# Altium PCB W-N-DM-V31_Display.PcbDoc
Units mm, origin at the board's own origin, x right, y up, seen from the top; angles counter-clockwise.
Board outline 40 x 160 mm, 2 copper layers (Top Layer, Bottom Layer); 73 components, 43 nets, 179 pads, 77 vias.
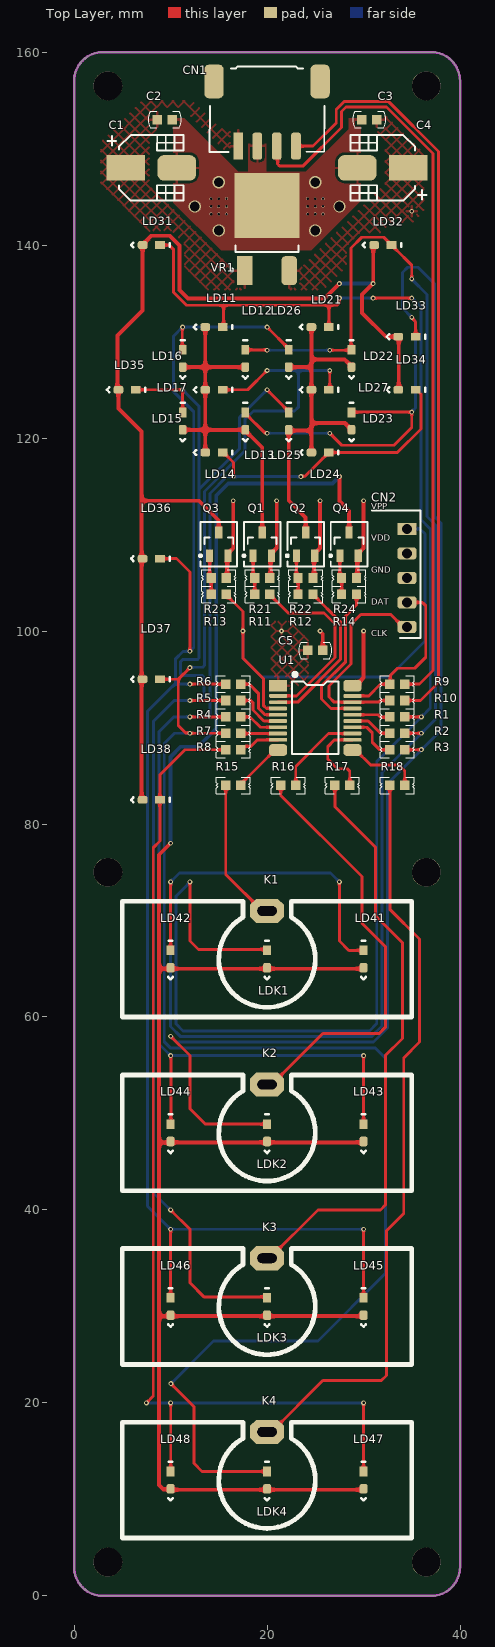
[diagram p0: Top Layer view]
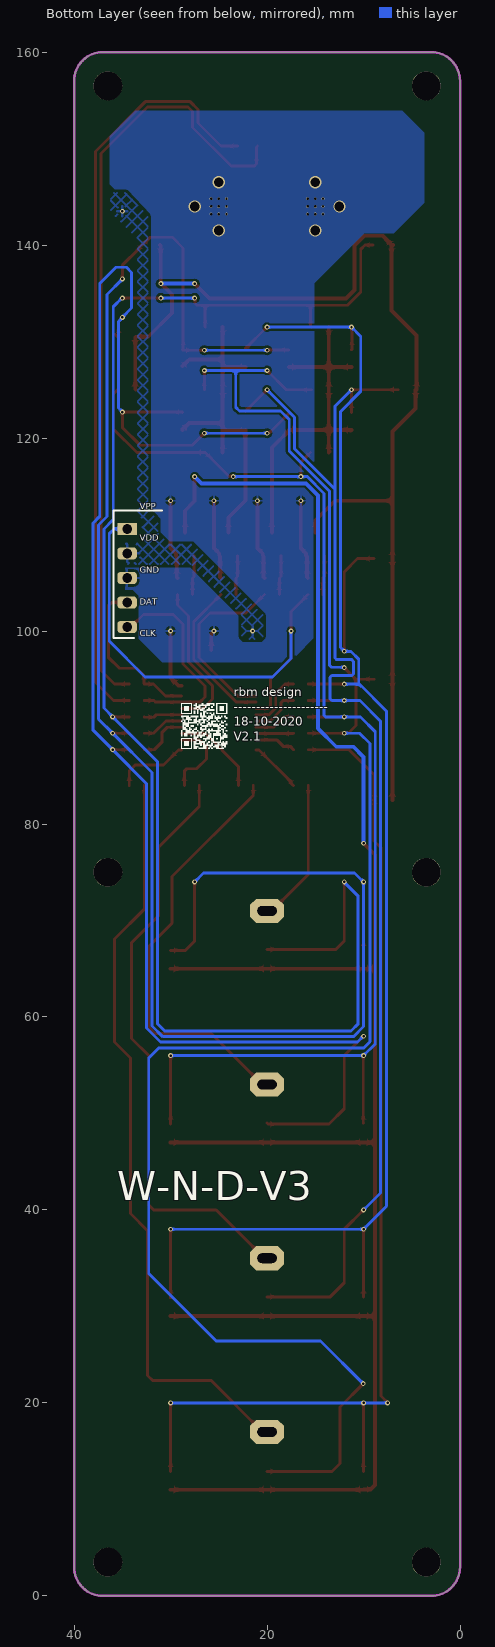
[diagram p1: Bottom Layer view, seen from below]
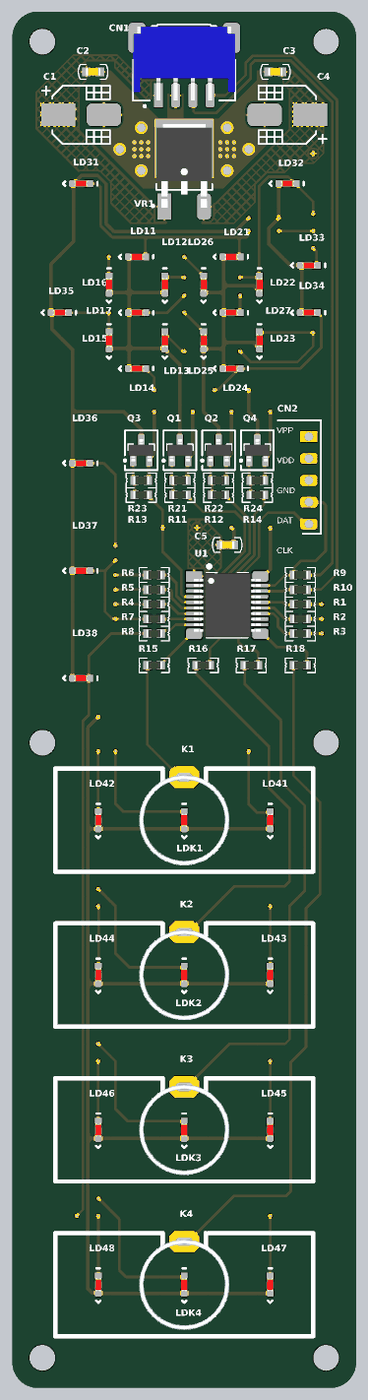
[diagram p2: 3D render of the assembled board from above, using the file's embedded part models]

## Layer stack, top to bottom
Top Solder: solder mask 0.0102, Solder Resist, Dk 3.5
Top Layer: signal copper 0.0356
Dielectric 1: dielectric 0.32, FR-4, Dk 4.8
Bottom Layer: signal copper 0.0356
Bottom Solder: solder mask 0.0102, Solder Resist, Dk 3.5

## Board outline
0,3 0,157 cw(c3,157) 3,160 37,160 cw(c37,157) 40,157 40,3 cw(c37,3) 37,0 3,0 cw(c3,3)

## Design rules (kind name [scope] priority, off if disabled: settings)
Clearance [All] p1: gap=0.254 ignorepadtopadclearanceinfootprint=FALSE except(0: Arc-Hole Track-Hole SMDPad-Hole THPad-Hole Via-Hole Fill-Hole Poly-Hole Region-Hole Text-Hole)
HoleSize [All] p1: absolutevalues=TRUE maxlimit=3.5 minlimit=0.025 maxpercent=80.000 minpercent=20.000
PlaneConnect [All] p1: planeconnectstyle=Relief reliefexpansion=0.508 reliefentries=4 reliefconductorwidth=0.3 reliefairgap=0.254
PolygonConnect [All] p1: connectstyle=Relief reliefconductorwidth=0.254 reliefentries=4 polygonreliefangle="90 Angle" airgapwidth=0.254
RoutingVias [All] p1: holewidth=0.254 width=0.508 viastyle="Through Hole" minholewidth=0.254 minwidth=0.3 maxholewidth=1 maxwidth=1.27
SolderMaskExpansion [All] p1: expansion=0.102 istentingtop=FALSE
UnRoutedNet [All] p1: checkbadconnections=TRUE
Width [All] p1: maxlimit=1 minlimit=0.254 preferedwidth=0.3
27 further rules are at their usual default settings.

## Components (designator, comment, footprint, x,y, rotation, side; value= is the part's Value field where it differs from the comment)
C1 "100uF ±20% 25V" C_SMD_Ø6.3*5.4MM 8,148 r0 top locked
C2 "470nF ±10% 25V X7R" C_0603 9.4,153 r0 top locked
C3 "100nF ±10% 25V X7R" C_0603 30.6,153 r180 top locked
C4 "100uF ±20% 16V" C_SMD_Ø6.3*5.4MM 32,148 r180 top locked
C5 "470nF ±10% 25V X7R" C_0603 25,98 r0 top
CN1 "PH Header Male; White" CN_4P_A2001WR-S-XP-LCP 20,153 r90 top locked
CN2 "Pin Header" CN_PIC_MCU_DEBUGGER_RIGHTANGLE 34.5,105.5 r0 top
K1 "Holo Type" K_CAP-TOUCH_WITH_LED-OPTION 20,66 r0 top locked
K2 "Holo Type" K_CAP-TOUCH_WITH_LED-OPTION 20,48 r0 top locked
K3 "Holo Type" K_CAP-TOUCH_WITH_LED-OPTION 20,30 r0 top locked
K4 "Holo Type" K_CAP-TOUCH_WITH_LED-OPTION 20,12 r0 top locked
LD11 "3V 20mA >700mcd 130°" LED_SMD0603 14.5,131.5 r180 top locked
LD12 "3V 20mA >700mcd 130°" LED_SMD0603 17.75,128.25 r270 top locked
LD13 "3V 20mA >700mcd 130°" LED_SMD0603 17.75,121.75 r270 top locked
LD14 "3V 20mA >700mcd 130°" LED_SMD0603 14.5,118.5 r180 top locked
LD15 "3V 20mA >700mcd 130°" LED_SMD0603 11.25,121.75 r270 top locked
LD16 "3V 20mA >700mcd 130°" LED_SMD0603 11.25,128.25 r270 top locked
LD17 "3V 20mA >700mcd 130°" LED_SMD0603 14.5,125 r180 top locked
LD21 "3V 20mA >700mcd 130°" LED_SMD0603 25.5,131.5 r180 top locked
LD22 "3V 20mA >700mcd 130°" LED_SMD0603 28.75,128.25 r270 top locked
LD23 "3V 20mA >700mcd 130°" LED_SMD0603 28.75,121.75 r270 top locked
LD24 "3V 20mA >700mcd 130°" LED_SMD0603 25.5,118.5 r180 top locked
LD25 "3V 20mA >700mcd 130°" LED_SMD0603 22.25,121.75 r270 top locked
LD26 "3V 20mA >700mcd 130°" LED_SMD0603 22.25,128.25 r270 top locked
LD27 "3V 20mA >700mcd 130°" LED_SMD0603 25.5,125 r180 top locked
LD31 "3V 20mA >700mcd 130°" LED_SMD0603 8,140 r180 top locked
LD32 "3V 20mA >700mcd 130°" LED_SMD0603 32,140 r180 top locked
LD33 "3V 20mA >700mcd 130°" LED_SMD0603 34.5,130.5 r180 top locked
LD34 "3V 20mA >700mcd 130°" LED_SMD0603 34.5,125 r180 top locked
LD35 "3V 20mA >700mcd 130°" LED_SMD0603 5.5,125 r180 top locked
LD36 "3V 20mA >700mcd 130°" LED_SMD0603 8,107.5 r180 top locked
LD37 "2V 20mA >450mcd 120°" LED_SMD0603 8,95 r180 top locked
LD38 "2V 20mA 360mcd 120°" LED_SMD0603 8,82.5 r180 top locked
LD41 "3V 20mA 450mcd 130°" LED_SMD0603 30,66 r270 top
LD42 "3V 20mA 450mcd 130°" LED_SMD0603 10,66 r270 top
LD43 "3V 20mA 450mcd 130°" LED_SMD0603 30,48 r270 top
LD44 "3V 20mA 450mcd 130°" LED_SMD0603 10,48 r270 top
LD45 "3V 20mA 450mcd 130°" LED_SMD0603 30,30 r270 top
LD46 "3V 20mA 450mcd 130°" LED_SMD0603 10,30 r270 top
LD47 "3V 20mA 450mcd 130°" LED_SMD0603 30,12 r270 top
LD48 "3V 20mA 450mcd 130°" LED_SMD0603 10,12 r270 top
LDK1 "3V 20mA 360mcd 120°" LED_SMD0603 20,66 r270 top
LDK2 "3V 20mA 360mcd 120°" LED_SMD0603 20,48 r270 top
LDK3 "3V 20mA 450mcd 120°" LED_SMD0603 20,30 r270 top
LDK4 "2V 20mA 360mcd 120°" LED_SMD0603 20,12 r270 top
Q1 "NPN 500mA 45V 300mW" Q_SOT-23_NPN 19.5,109 r0 top
Q2 "NPN 500mA 45V 300mW" Q_SOT-23_NPN 24,109 r0 top
Q3 "NPN 500mA 45V 300mW" Q_SOT-23_NPN 15,109 r0 top
Q4 "NPN 500mA 45V 300mW" Q_SOT-23_NPN 28.5,109 r0 top
R1 "120Ω ±1% 0.125W ±100ppm/℃" R_0603 33.5,91.1 r0 top
R2 "120Ω ±1% 0.125W ±100ppm/℃" R_0603 33.5,89.4 r0 top
R3 "120Ω ±1% 0.125W ±100ppm/℃" R_0603 33.5,87.7 r0 top
R4 "120Ω ±1% 0.125W ±100ppm/℃" R_0603 16.5,91.1 r180 top
R5 "120Ω ±1% 0.125W ±100ppm/℃" R_0603 16.5,92.8 r180 top
R6 "120Ω ±1% 0.125W ±100ppm/℃" R_0603 16.5,94.5 r180 top
R7 "120Ω ±1% 0.125W ±100ppm/℃" R_0603 16.5,89.4 r180 top
R8 "120Ω ±1% 0.125W ±100ppm/℃" R_0603 16.5,87.7 r180 top
R9 "120Ω ±1% 0.125W ±100ppm/℃" R_0603 33.5,94.5 r0 top
R10 "120Ω ±1% 0.125W ±100ppm/℃" R_0603 33.5,92.8 r0 top
R11 "1kΩ ±1% 0.1W ±50ppm/℃" R_0603 19.5,103.8 r180 top
R12 "1kΩ ±1% 0.1W ±50ppm/℃" R_0603 24,103.8 r180 top
R13 "1kΩ ±1% 0.1W ±50ppm/℃" R_0603 15,103.8 r180 top
R14 "1kΩ ±1% 0.1W ±50ppm/℃" R_0603 28.5,103.8 r180 top
R15 "1kΩ ±1% 0.1W ±50ppm/℃" R_0603 16.5,84 r180 top
R16 "1kΩ ±1% 0.1W ±50ppm/℃" R_0603 22.2,84 r180 top
R17 "1kΩ ±1% 0.1W ±50ppm/℃" R_0603 27.8,84 r180 top
R18 "1kΩ ±1% 0.1W ±50ppm/℃" R_0603 33.5,84 r180 top
R21 "47kΩ ±1% 0.1W ±100ppm/℃" R_0603 19.5,105.5 r0 top
R22 "47kΩ ±1% 0.1W ±100ppm/℃" R_0603 24,105.5 r0 top
R23 "47kΩ ±1% 0.1W ±100ppm/℃" R_0603 15,105.5 r0 top
R24 "47kΩ ±1% 0.1W ±100ppm/℃" R_0603 28.5,105.5 r0 top
U1 "PIC16F18346T-I/SS" U_PIC_20PIN_SSOP 25,91 r0 top
VR1 "Fixed 5V @ 1A(typ)" VR_TO-252-2(DPAK) 20,141.5 r0 top locked

## Footprints (in the part's own frame and the unit in brackets; to place one, negate y for a bottom-side part, rotate by r counter-clockwise, add the part's x,y. Pads: shape width x height; smd on the part's side, far side on the other; paste and mask are expansions set on the pad)
C_0603 [mm] "0603 Multilayer Ceramic Capacitors MLCC - SMD/SMT RoHS"
  rect 1x1 smd: 1(-0.775,0) 2(0.775,0)
  silkscreen extent -1.72,-0.85 1.72,0.85, body extent -0.85,-0.45 0.85,0.45, height 0.87
C_SMD_Ø6.3*5.4MM [mm] "SMD 6.3x5.4mm Aluminum Electrolytic Capacitors - SMD RoHS"
  rect 4x2.65 smd: 1(-2.65,0)
  rrect50% 4x2.65 smd: 2(2.65,0)
  silkscreen extent -4.55,-3.4 3.35,3.4, body extent -3.4,-3.4 3.4,3.4, height 5.8
CN_4P_A2001WR-S-XP-LCP [mm]
  rrect50% 3.5x2 smd: 0(3.95,-5.5) 0(3.95,5.5)
  rect 2.8x1 smd: 1(-2.75,3)
  rrect50% 2.8x1 smd: 2(-2.75,1) 3(-2.75,-1) 4(-2.75,-3)
  round 0.5 on Top Overlay: ""(-4,4.6)
  silkscreen extent -3.35,-5.94 5.51,5.95, body extent -3.35,-5.95 5.25,5.95, height 5.6
CN_PIC_MCU_DEBUGGER_RIGHTANGLE [mm] "2.54mmPitch, 5pins, StraightType, Male Connector"
  rect 2x1.25 hole 1: 1(0,5.08)
  rrect50% 2x1.25 hole 1: 2(0,2.54) 3(0,0) 4(0,-2.54) 5(0,-5.08)
  silkscreen extent -3.6,-6.22 1.4,6.98
K_CAP-TOUCH_WITH_LED-OPTION [mm]
  oct 3.5x2.5 hole 2 slot 1 at 90 deg: 1(0,5)
  silkscreen extent -15,-6 15,6, body extent -5.25,-5.25 5.25,5.25, height 11.25
LED_SMD0603 [mm]
  rect 1x0.8 smd: 1(-0.9,0)
  rrect50% 1x0.8 smd: 2(0.9,0)
  silkscreen extent -1.9,-0.25 2.1,0.25, body extent -0.81,-0.4 0.81,0.4, height 0.6
Q_SOT-23_NPN [mm] "NPN 200mA 40V 250mW SOT-23(SOT-23-3)"
  rect 0.75x1.25 smd: 1(-0.95,-1.2) 2(0.95,-1.2) 3(0,1.2)
  silkscreen extent -2.02,-2.3 1.9,2.3, body extent -1.5,-1.3 1.5,1.3, height 1.15
R_0603 [mm] "RK73G1JTTD1000F; 0603 Chip Resistor - Surface Mount RoHS"
  rect 0.95x1 smd: 1(-0.775,0) 2(0.775,0)
  silkscreen extent -1.75,-0.85 1.75,0.85, body extent -0.9,-0.45 0.9,0.45, height 0.55
U_PIC_20PIN_SSOP [mm] "SOP, 20-Leads, Body 7.20x5.30mm, Pitch 0.65mm, IPC Medium Density"
  rect 1.85x1.2 smd mask+0.2: 1(-3.85,3.33)
  rrect50% 1.85x0.395 smd mask+0.2: 2(-3.85,2.275) 3(-3.85,1.625) 4(-3.85,0.975) 5(-3.85,0.325) 6(-3.85,-0.325) 7(-3.85,-0.975) 8(-3.85,-1.625) 9(-3.85,-2.275) 12(3.85,-2.275) 13(3.85,-1.625) 14(3.85,-0.975) 15(3.85,-0.325) 16(3.85,0.325) 17(3.85,0.975) 18(3.85,1.625) 19(3.85,2.275)
  rrect50% 1.85x1.2 smd mask+0.2: 10(-3.85,-3.33) 11(3.85,-3.33) 20(3.85,3.33)
  silkscreen extent -2.4,-3.75 2.4,4.62, body extent -3.9,-3.75 3.9,3.75, height 2
VR_TO-252-2(DPAK) [mm] "D-PAK, 3-Pads, Body 6.20x6.61mm (max), IPC Medium Density"
  rect 6.7x6.7 smd: GND(0,2.6)
  rect 1.6x3 smd: V-IN(-2.3,-4.15)
  rrect50% 1.6x3 smd: V-OUT(2.3,-4.15)
  silkscreen extent -3.77,-4.22 3.25,-1.55, body extent -3.25,-4.27 3.25,5.45, height 2.5

## Part data
C1 C4: library part "Capacitor>> Polar", "SMD,6.3x5.4mm Aluminum Electrolytic Capacitors - SMD RoHS"
C2 C3 C5: library part "Capacitor>> Non-Polar", "0603 Multilayer Ceramic Capacitors MLCC - SMD/SMT RoHS"
CN1: library part "Connector>> 4Pins", "A2001WR-S-4P; Pin 0.079\"(2.00mm) 4 SMD,P=2mm Wire To Board / Wire To Wire Connector RoHS"
CN2: library part "Connector>> PIC Program", "A2541WR-5P/MTB125-1105R1/PZ254R-11-05P ;5pins, right-angle 90degrees 2.54mm Through Hole,P=2.54mm Pin Header & Female Header RoHS"
K1 K2 K3 K4: library part "Key>> Cap Touch"
LD11 LD12 LD13 LD14 LD15 LD16 LD17 LD21 LD22 LD23 LD24 LD25 LD26 LD27 LD31 LD32 LD33 LD34 LD35 LD36: library part "LED>> General Purpose", "MHT192WDT-ICE; ICE-BLUE Color - 0603 Light Emitting Diodes (LED) RoHS"
LD37: library part "LED>> General Purpose", "MHT192URCT; Brilliant Red Color - 0603 Light Emitting Diodes (LED) RoHS"
LD38 LDK4: library part "LED>> General Purpose", "MHT192USCT; Brilliant Orange Color - 0603 Light Emitting Diodes (LED) RoHS"
LD41 LD42 LD43 LD44 LD45 LD46 LD47 LD48: library part "LED>> General Purpose", "MHT192WDT-C2; WHITE Color - 0603 Light Emitting Diodes (LED) RoHS"
LDK1 LDK2: library part "LED>> General Purpose", "MHT192UBCT; Brilliant Blue Color - 0603 Light Emitting Diodes (LED) RoHS"
LDK3: library part "LED>> General Purpose", "MHT192UGCT; Brilliant Green Color - 0603 Light Emitting Diodes (LED) RoHS"
Q1 Q2 Q3 Q4: library part "Transistor>> BJT npn", "BC817-40; SOT-23(SOT-23-3) Transistors (NPN/PNP) RoHS"
R1 R2 R3 R4 R5 R6 R7 R8 R9 R10: library part "Resistor>> General Purpose", "RK73H1JTTD1200F; 0603 Chip Resistor - Surface Mount RoHS"
R11 R12 R13 R14 R15 R16 R17 R18: library part "Resistor>> General Purpose", "RK73G1JTTD1001F; 0603 Chip Resistor - Surface Mount RoHS"
R21 R22 R23 R24: library part "Resistor>> General Purpose", "RK73H1JTTD4702F; 0603 Chip Resistor - Surface Mount RoHS"
U1: library part "IC>> PIC 20Pins", "Lead Count: 20 / Package Type: SSOP / Temp Range: -40C to +85C / Packing Media: Tape and reel (1600)"
VR1: library part "Voltage Regulator", "CJ78D05/MC7805BDTRKG; TO-252-2(DPAK) Dropout Regulators(LDO) RoHS"

## Free pads (board coordinates)
  round 3 hole 3 unplated: 0(3.5,3.5) 0(3.5,75) 0(3.5,156.5) 0(36.5,3.5) 0(36.5,75) 0(36.5,156.5)

## Via types
v1: diameter 0.508, hole 0.254, Top Layer to Bottom Layer, 53 vias
v2: diameter 0.3, hole 0.254, Top Layer to Bottom Layer, 18 vias
v3: diameter 1.27, hole 1, Top Layer to Bottom Layer, 6 vias

## Nets (pads, with @x,y where several pads share a name; then routed paths per layer and width w, separated by ;. In a path a pad name is that pad's centre, name@x,y a point inside that pad or via, vN(x,y) a via of type N, cw(c..) or ccw(c..) an arc to the next point about the centre after c; other vN are vias at no path point)
+12: C1.1 C2.1 CN1.1 VR1.V-IN
CLK: CN2.5 R10.1 U1.18 | length 21.9
  Top Layer w0.3: R10.1 31.713,92.8 31.538,92.625 U1.18 26.967,92.625 26.416,93.176 26.416,94.297 28.702,96.583 28.702,100.711 29.718,101.727 32.818,101.727 34.125,100.42 CN2.5
DAT: CN2.4 R9.1 U1.19 | length 17.2
  Top Layer w0.3: U1.19 30.537,93.275 31.762,94.5 R9.1 32.766,94.541 32.766,95.377 33.528,96.139 35.306,96.139 36.449,97.282 36.449,102.616 36.194,102.871 36.105,102.96 CN2.4
GND: C1.2 C2.2 C3.2 C4.2 C5.2 CN1.2 CN2.3 Q1.2 Q2.2 Q3.2 Q4.2 R21.2 R22.2 R23.2 R24.2 U1.20 VR1.GND | length 41.7
  Top Layer w0.4: R23.2 15.862,105.587 15.862,107.713 Q3.2 15.95,108.05 16.5,108.6 v1(16.5,113.5) ; R21.2 20.362,105.587 20.362,107.713 Q1.2 20.45,108.05 21,108.6 v1(21,113.5) ; R22.2 24.862,105.587 24.862,107.713 Q2.2 24.95,108.05 25.5,108.6 v1(25.5,113.5) ; v1(25.5,100) 25.5,99.976 25.775,99.701 C5.2 ; U1.20 29.179,94.33 30,95.151 v1(30,100) ; R24.2 29.362,105.587 29.362,107.713 Q4.2 29.45,108.05 30,108.6 v1(30,113.5)
  other v2: 14.2,143.2 15,143.2 15.8,143.2 24.2,143.2 25,143.2 25.8,143.2 14.2,144 15,144 15.8,144 24.2,144 25,144 25.8,144 14.2,144.8 15,144.8 15.8,144.8 24.2,144.8 25,144.8 25.8,144.8
  other v3: 15,141.5 25,141.5 12.5,144 27.5,144 15,146.5 25,146.5
I_K1: R15.1 U1.10 | length 5.5
  Top Layer w0.3: R15.1 17.6,84.325 17.6,84.445 20.825,87.67 U1.10
I_K2: R16.1 U1.13 | length 9.3
  Top Layer w0.3: R16.1 22.975,85.967 26.383,89.375 U1.13
I_K3: R17.1 U1.12 | length 8.4
  Top Layer w0.3: R17.1 28.575,85.471 28.321,85.725 27.305,85.725 26.289,86.741 26.289,88.011 27.003,88.725 U1.12
I_K4: R18.1 U1.11 | length 7.8
  Top Layer w0.3: U1.11 29.175,87.67 30.739,86.106 33.655,86.106 34.275,85.486 R18.1
NetK1_1: K1.1 R15.2 | length 15.1
  Top Layer w0.3: R15.2 15.725,74.775 19.5,71 K1.1
NetK2_1: K2.1 R16.2 | length 44.3
  Top Layer w0.3: K2.1 20.488,53 25.781,58.293 31.623,58.293 32.258,58.928 32.258,67.31 29.845,69.723 29.845,74.549 21.425,82.969 R16.2
NetK3_1: K3.1 R17.2 | length 61.7
  Top Layer w0.3: K3.1 20.268,35 25.273,40.005 31.75,40.005 32.258,40.513 32.258,56.007 34.036,57.785 34.036,67.691 31.242,70.485 31.242,77.597 27.025,81.814 R17.2
NetK4_1: K4.1 R18.2 | length 78.7
  Top Layer w0.3: K4.1 20.465,17 25.781,22.316 31.841,22.316 32.385,22.86 32.385,37.846 34.163,39.624 34.163,55.753 35.814,57.404 35.814,68.072 32.725,71.161 R18.2
NetLD11_1: LD11.1 LD21.1 LD31.1 LDK1.1 R1.2 | length 167.5
  Top Layer w0.3: LD31.1@9,140 9.86,140 10.287,139.573 10.287,135.128 11.653,133.762 15.494,133.762 ; v1(12,74) 12,67.883 12.883,67 LDK1.1@20,67 ; LD11.1 15.494,131.594 15.494,133.762 ; LD21.1 26.416,131.516 26.416,133.762 ; v1(27.5,134.5) 27.46,134.46 27.46,133.966 27.256,133.762 26.416,133.762 ; v1@31.061,134.5 v1(35,134.5) ; R1.2 v1(36,91.1) ; 15.494,133.762 26.416,133.762
  Bottom Layer w0.3: v1(12,74) 12,73.963 10.554,72.517 10.554,59.296 11.303,58.547 30.607,58.547 31.369,59.309 31.369,86.469 v1(36,91.1) 36.911,92.011 36.911,110.583 35.941,111.553 35.941,133.604 35.045,134.5 v1(35,134.5) ; v1(27.5,134.5) v1(31,134.5)
NetLD11_2: LD11.2 LD12.2 LD13.2 LD14.2 LD15.2 LD16.2 LD17.2 Q1.3 | length 37.7
  Top Layer w0.4: LD16.2 13.6,127.35 ; LD15.2@11.35,120.75 LD15.2 13.6,120.85 ; LD14.2 13.5,118.6 13.6,118.7 13.6,120.85 ; LD11.2 13.6,127.35 ; LD13.2@17.65,120.75 LD13.2 13.6,120.85 ; LD13.2@17.75,120.75 19.5,119 Q1.3 ; LD12.2 17.713,127.387 17.676,127.35 13.6,127.35 ; 13.6,120.85 LD17.2 13.6,127.35
NetLD12_1: LD12.1 LD22.1 LD32.1 LD41.1 LD42.1 R2.2 | length 185.7
  Top Layer w0.3: LD42.1@10,67 v1(10,74) ; LD12.1 17.768,129.132 19.904,129.132 20,129.036 v1@20,129.004 ; v1@26.5,129.004 26.596,129.1 28.7,129.1 LD22.1 ; v1(27.5,74) 27.5,67.877 28.477,66.9 LD41.1 ; LD22.1@28.702,129.298 28.702,139.7 29.806,140.804 30.45,140.804 31.55,140.804 32.096,140.804 LD32.1 ; R2.2 v1(36,89.4) ; v1(35,136.5) 35,137.9 33.25,139.65 33.25,139.75 LD32.1@33,140 ; LD32.1 LD32.1@33,140 ; LD32.1 LD32.1@33,140
  Bottom Layer w0.3: v1@20,129.004 20.096,129.1 26.404,129.1 v1@26.5,129.004 ; v1(27.5,74) 26.57,74.93 10.93,74.93 v1(10,74) 10,59.007 11.049,57.958 30.801,57.958 31.923,59.08 31.923,85.323 v1(36,89.4) 37.465,90.865 37.465,110.977 36.576,111.866 36.576,134.874 35,136.45 v1(35,136.5)
  other v1: 20,129.1 26.5,129.1
NetLD13_1: LD13.1 LD23.1 LD33.1 LDK2.1 R3.2 | length 171.2
  Top Layer w0.3: v1(10,58) 12,56 12,50.484 13.589,48.895 19.895,48.895 LDK2.1@20,49 ; LD13.1 17.75,122.55 19.76,120.54 19.96,120.54 v1(20,120.5) ; v1(26.5,120.5) 27.747,119.253 33.147,119.253 35,121.106 v1(35,122.682) 28.782,122.682 LD23.1 ; R3.2 v1(36,87.7) ; v1(35,132.5) 35,132.444 35.4,132.044 LD33.1 35.5,130.5 LD33.1@35.75,130.75
  Bottom Layer w0.3: v1(10,58) 10.044,58 10.64,57.404 31.031,57.404 32.477,58.85 32.477,84.177 v1(36,87.7) 38.019,89.719 38.019,111.206 37.338,111.887 37.338,136.017 35.655,137.7 34.576,137.7 34.036,137.16 34.036,133.464 v1(35,132.5) 35,132.444 35.387,132.057 35.387,123.125 35,122.738 v1(35,122.682) ; v1(20,120.5) v1(26.5,120.5)
NetLD14_1: LD14.1 LD24.1 LD34.1 LD43.1 LD44.1 R4.2 | length 132.8
  Top Layer w0.3: LD44.1@10,49 10.028,49.028 v1@10.028,55.972 ; v1(12,91.1) R4.2 ; LD14.1@15.5,118.5 15.494,118.494 16.51,117.478 v1@16.51,116 ; v1(23.5,116) 23.54,116.04 23.94,116.04 LD24.1 33.491,118.5 35.941,120.95 35.941,124.534 35.75,124.725 35.75,124.75 35.5,125 LD34.1 ; LD43.1 v1(30,56)
  Bottom Layer w0.3: v1(23.5,116) v1(16.5,116) 15.832,116 14.097,114.265 14.097,91.276 13.921,91.1 v1(12,91.1) 10.328,91.1 8.788,89.56 8.788,57.212 v1(10,56) 10.007,56.007 29.993,56.007 v1(30,56)
NetLD15_1: LD15.1 LD25.1 LD35.1 LDK3.1 R5.2 | length 138.5
  Top Layer w0.3: LD35.1 v1(11.25,125) LD15.1 ; v1(10,40) 12,38 12,32.45 13.45,31 LDK3.1@20,31 ; v1(12,92.8) R5.2 ; v1(20,125) LD25.1@22.25,122.75
  Bottom Layer w0.3: v1(10,40) 8.234,41.766 8.234,90.657 10.377,92.8 v1(12,92.8) 13.286,92.8 13.462,92.976 13.462,95.201 13.286,95.377 11.225,95.377 11.049,95.553 11.049,96.852 11.225,97.028 12.778,97.028 12.954,97.204 12.954,114.689 17.145,118.88 17.145,122.145 v1(20,125) ; v1(11.25,125) 12.954,123.296 12.954,114.755
NetLD16_1: LD16.1 LD26.1 LD36.1 LD45.1 LD46.1 R6.2 | length 163.7
  Top Layer w0.3: LD36.1 10.61,107.5 12,106.11 v1(12,97.9) ; LD46.1@10,31 v1(10,38) ; v1@11.213,131.408 11.213,129.187 LD16.1 ; v1(12,94.5) R6.2 ; v1(20,131.5) 22.25,129.25 LD26.1 ; LD45.1 v1(30,38)
  Bottom Layer w0.3: v1(12,94.5) 10.426,94.5 ; v1(20,131.5) v1(11.25,131.5) 10.287,130.537 10.287,124.841 12.4,122.728 12.4,98.298 12.002,97.9 v1(12,97.9) 11.983,97.883 11.296,97.883 10.495,97.082 10.495,94.569 10.426,94.5 ; v1(30,38) v1(10,38) 7.609,40.391 7.609,91.683 10.426,94.5
NetLD17_1: LD17.1 LD27.1 LD37.1 LDK4.1 R7.2 | length 190.4
  Top Layer w0.3: LD37.1 10.791,95 10.795,94.996 ; v1(10.033,22) 12.446,19.587 12.446,13.716 13.262,12.9 LDK4.1 ; v1(12,96.2) 10.795,94.995 10.795,90.219 11.574,89.44 11.96,89.44 v1(12,89.4) R7.2 ; LD17.1 18,125 v1(20,127) ; LD27.1@26.5,125 v1(26.5,127)
  Bottom Layer w0.3: v1(10.033,22) 14.449,26.416 25.273,26.416 32.258,33.401 32.258,55.753 31.242,56.769 10.014,56.769 9.342,57.441 9.342,88.336 10.406,89.4 v1(12,89.4) ; v1(12,96.2) 12.04,96.24 13.332,96.24 13.508,96.416 13.508,114.46 17.699,118.651 17.699,121.916 18.592,122.809 22.86,122.809 23.241,123.19 23.241,127 ; v1(20,127) 23.241,127 ; v1(26.5,127) 23.241,127
NetLD21_2: LD21.2 LD22.2 LD23.2 LD24.2 LD25.2 LD26.2 LD27.2 Q2.3 | length 38.5
  Top Layer w0.4: LD25.2@22.25,120.75 22.25,113.513 24,111.763 Q2.3 ; LD25.2 22.323,120.777 24.6,120.777 ; LD26.2 24.6,127.35 ; LD24.2 24.6,120.777 ; LD21.2 24.6,128.143 ; LD23.2 28.75,120.95 28.55,121.15 LD23.2@28.495,121.15 ; LD22.2@28.75,127.45 28.057,128.143 24.6,128.143 ; 24.6,120.777 24.6,121.539 ; 24.6,121.539 28.061,121.539 ; 24.6,121.539 LD27.2 24.6,127.35 ; 24.6,127.35 24.6,128.143 ; 28.061,121.539 28.106,121.539 LD23.2@28.495,121.15 ; 28.061,121.539 28.45,121.15 LD23.2@28.495,121.15
NetLD31_2: LD31.2 LD32.2 LD33.2 LD34.2 LD35.2 LD36.2 LD37.2 LD38.2 Q3.3 | length 118
  Top Layer w0.4: LD35.2@4.5,125 4.5,130.611 7.1,133.211 7.1,139.827 LD31.2@6.927,140 ; LD35.2 4.6,123.063 7,120.663 7,113.5 ; LD38.2@7,82.5 7,113.5 ; LD31.2@7.086,140.014 7.35,140.277 8.043,140.97 9.906,140.97 10.922,139.954 10.922,135.347 11.821,134.448 25.948,134.448 v1(27.5,136) ; Q3.3 15,111.45 12.95,113.5 7,113.5 ; v1@30.988,136 31.009,136.021 31.009,139.909 LD32.2 ; v1(31,136) 30.971,136 29.845,134.874 29.845,132.969 32.314,130.5 LD33.2 33.655,130.445 33.655,125.055 LD34.2
  Bottom Layer w0.4: v1(27.5,136) v1@30.988,136
NetLD38_1: LD38.1 LD47.1 LD48.1 R8.2 | length 110.2
  Top Layer w0.3: v1(7.5,20) 8.205,20.705 8.205,77.547 8.9,78.242 LD38.1 8.9,85.1 11.5,87.7 R8.2 ; LD48.1 10.017,12.916 10.017,19.923 v1@10.033,19.939 ; LD47.1 v1(30,20)
  Bottom Layer w0.3: v1@7.62,19.939 7.681,20 v1(10,20) v1@10.094,20 ; v1@10.033,19.939 v1@10.094,20 ; v1(30,20) v1@10.094,20
NetLD41_2: LD41.2 LD42.2 LD43.2 LD44.2 LD45.2 LD46.2 LD47.2 LD48.2 LDK1.2 LDK2.2 LDK3.2 LDK4.2 Q4.3 | length 210.8
  Top Layer w0.4: v1(10,78) 8.809,76.809 8.809,65 ; v1(27.5,116) 27.5,113.47 28.5,112.47 Q4.3 ; LD47.2@30,11 10,11 9.951,11.049 9.271,11.049 8.809,11.511 8.809,29 ; LD45.2@30,29 8.809,29 ; LD43.2@30,47 10,47 9.99,46.99 8.809,46.99 ; LD41.2@30,65 8.809,65 ; 8.809,29 8.809,46.99 ; 8.809,46.99 8.809,65
  Bottom Layer w0.4: v1(10,78) 10,86.962 11.049,88.011 12.827,88.011 14.732,89.916 14.732,114.046 15.978,115.292 26.792,115.292 v1(27.5,116)
NetQ1_1: Q1.1 R11.2 R21.1 | length 4.1
  Top Layer w0.3: Q1.1 18.55,105.675 R21.1 R11.2
NetQ2_1: Q2.1 R12.2 R22.1 | length 4.1
  Top Layer w0.3: Q2.1 23.05,105.675 R22.1 R12.2
NetQ3_1: Q3.1 R13.2 R23.1 | length 4.1
  Top Layer w0.3: Q3.1 14.05,105.675 R23.1 R13.2
NetQ4_1: Q4.1 R14.2 R24.1 | length 4.1
  Top Layer w0.3: Q4.1 27.55,105.675 R24.1 R14.2
O_7S1: R1.1 U1.16 | length 4
  Top Layer w0.3: U1.16 31.484,91.325 31.75,91.059 32.684,91.059 R1.1
O_7S2: R2.1 U1.15 | length 4.4
  Top Layer w0.3: U1.15 30.48,90.675 31.755,89.4 R2.1
O_7S3: R3.1 U1.14 | length 5.4
  Top Layer w0.3: U1.14 30.335,90.025 30.907,89.454 30.907,88.473 31.68,87.7 R3.1
O_7S4: R4.1 U1.7 | length 4.3
  Top Layer w0.3: R4.1 18.247,91.1 19.322,90.025 U1.7
O_7S5: R5.1 U1.6 | length 5.2
  Top Layer w0.3: R5.1 18.325,92.8 18.414,92.711 18.542,92.583 18.542,91.8 19.667,90.675 U1.6
O_7S6: R6.1 U1.5 | length 6.1
  Top Layer w0.3: R6.1 18.149,94.5 19.096,93.553 19.096,92.029 19.8,91.325 U1.5
O_7S7: R7.1 U1.8 | length 3.9
  Top Layer w0.3: R7.1 17.3,89.375 U1.8
O_7S8: R8.1 U1.9 | length 4.3
  Top Layer w0.3: R8.1 17.275,87.725 17.6,88.05 18.327,88.05 19.002,88.725 U1.9
O_DIG1: R11.1 U1.2 | length 19.1
  Top Layer w0.3: R11.1 20.275,103.775 22.196,101.854 25.908,101.854 27.04,100.722 27.04,97.271 23.044,93.275 U1.2
O_DIG2: R12.1 U1.3 | length 16.2
  Top Layer w0.3: U1.3 23.177,92.625 27.594,97.042 27.594,100.956 24.775,103.775 R12.1
O_DIG3: CN2.1 R13.1 U1.4 | length 52
  Top Layer w0.3: R13.1 16.1,103.475 16.1,103.407 17.5,102.007 v1(17.5,100) 17.5,97.181 19.65,95.031 19.65,92.258 19.933,91.975 U1.4
  Bottom Layer w0.3: v1@17.526,100.076 17.526,97.155 19.431,95.25 32.639,95.25 36.357,98.968 36.357,110.074 35.851,110.58 CN2.1
O_DIG4: R14.1 U1.17 | length 15.9
  Top Layer w0.3: U1.17 26.643,91.975 25.654,92.964 25.654,94.318 28.148,96.812 28.148,101.554 29.275,102.681 R14.1
Rx: CN1.3 R9.2 | length 80.7
  Top Layer w0.3: CN1.3 21.096,150.154 21.096,148.385 21.272,148.209 23.749,148.209 27.732,152.192 27.732,153.843 28.194,154.305 32.385,154.305 37.211,149.479 37.211,95.909 35.802,94.5 R9.2
Tx: CN1.4 R10.2 | length 78.9
  Top Layer w0.3: CN1.4 24.774,150.25 27.167,152.643 27.167,154.062 27.965,154.859 32.614,154.859 37.765,149.708 37.765,94.661 35.904,92.8 R10.2
VDD: C3.1 C4.1 C5.1 CN2.2 U1.1 VR1.V-OUT
  other v1: 21.5,100 35,143.5
pads on no net: CN1. CN1.0

## Polygon pours and split planes (outlines as drawn)
VDD on Top Layer "VDD_L01_P001" (hatched 45Degree grid 0.8 track 0.2, remove dead copper, pour order 1): 22.098,137.668 23.622,137.668 32.258,146.304 32.258,150.876 31.496,151.638 31.496,153.289 32.357,153.289 36.195,149.526 36.195,143.51 35.052,142.367 32.766,142.367 25.781,135.382 22.098,135.382
VDD on Top Layer "VDD_L01_P006" (hatched 45Degree grid 0.8 track 0.2, remove dead copper, pour order 6): 20.447,100.965 22.352,100.965 24.257,99.06 24.257,95.278 22.797,93.98 21.092,93.98 20.447,94.652 20.447,98.298
GND on Top Layer "GND_L01_P004" (solid, remove dead copper, pour order 4): 10.287,144.399 10.287,153.162 11.407,153.162 16.994,147.574 18.034,147.574 18.034,150.495 19.939,150.495 19.939,147.574 24.003,147.574 28.448,152.019 28.448,153.162 29.718,153.162 29.718,144.573 24.591,139.446 15.24,139.446
+12 on Top Layer "+12_L01_P002" (hatched 45Degree grid 0.8 track 0.2, remove dead copper, pour order 2): 2.794,150.622 7.112,154.94 12.192,154.94 15.113,152.019 17.272,152.019 17.272,149.86 15.621,149.86 11.938,153.543 11.938,154.305 8.509,154.305 8.509,151.892 7.747,151.13 7.747,146.177 16.256,137.668 17.907,137.668 17.907,135.382 13.843,135.382 2.794,146.431
GND on Bottom Layer "GND_L02_P005" (solid, remove dead copper, pour order 5): 3.683,151.638 5.969,153.924 33.655,153.924 36.322,151.257 36.322,146.304 34.036,144.018 34.036,114.046 31.369,111.379 31.369,107.569 32.258,106.68 34.671,106.68 34.671,104.267 33.909,104.267 33.274,103.632 33.274,99.187 30.861,96.774 17.653,96.774 15.113,99.314 15.113,136.017 9.906,141.224 6.858,141.224 3.683,144.399
VDD on Bottom Layer "VDD_L02_P000" (hatched 45Degree grid 0.8 track 0.2, pour order 0): 32.385,142.989 34.655,145.415 36.195,145.415 36.195,143.51 33.401,140.716 33.401,112.141 32.893,111.633 32.893,109.093 34.655,109.093 34.655,106.934 27.813,106.934 22.606,101.727 22.606,99.441 22.352,99.187 20.701,99.187 20.447,99.441 20.447,101.6 27.813,108.966 30.226,108.966 31.369,110.109 31.369,111.506 32.385,112.522

## Keep-outs
Keep-Out Layer:
  lines w0.254: 36.957,0 3,0 cw(c3,3) 0,3 0,157 cw(c3,157) 3,160 36.975,160 ; 37,0 ccw(c37,3) 40,3 40,157 ccw(c37,157) 37,160

## Silkscreen, mask and mechanical layers (free items; w line width, h text height)
Bottom Overlay:
  drawing of 44 lines, arcs and shapes, not listed
  text "rbm design / --------------------- / 18-10-2020 / V2.1" at 23.468,88.333 h1.52
  text "W-N-D-V3" at 35.5,41 h3

## Text inside footprints (layer, text, board x,y; h text height)
CN2: Top Overlay "VPP /  /  / VDD /  /  / GND /  /  / DAT /  /  / CLK" at 30.8,99.18 h1.1; Bottom Overlay "VPP /  /  / VDD /  /  / GND /  /  / DAT /  /  / CLK" at 33.2,99.18 h1.1